# Altium PCB Twitch_Switch_PCB.PcbDoc (part 1 of 3)
Units mil, origin at the board's own origin, x right, y up, seen from the top; angles counter-clockwise.
Board outline 3095 x 1923 mil, 2 copper layers (Top Layer, Bottom Layer); 103 components, 59 nets, 319 pads, 189 vias.
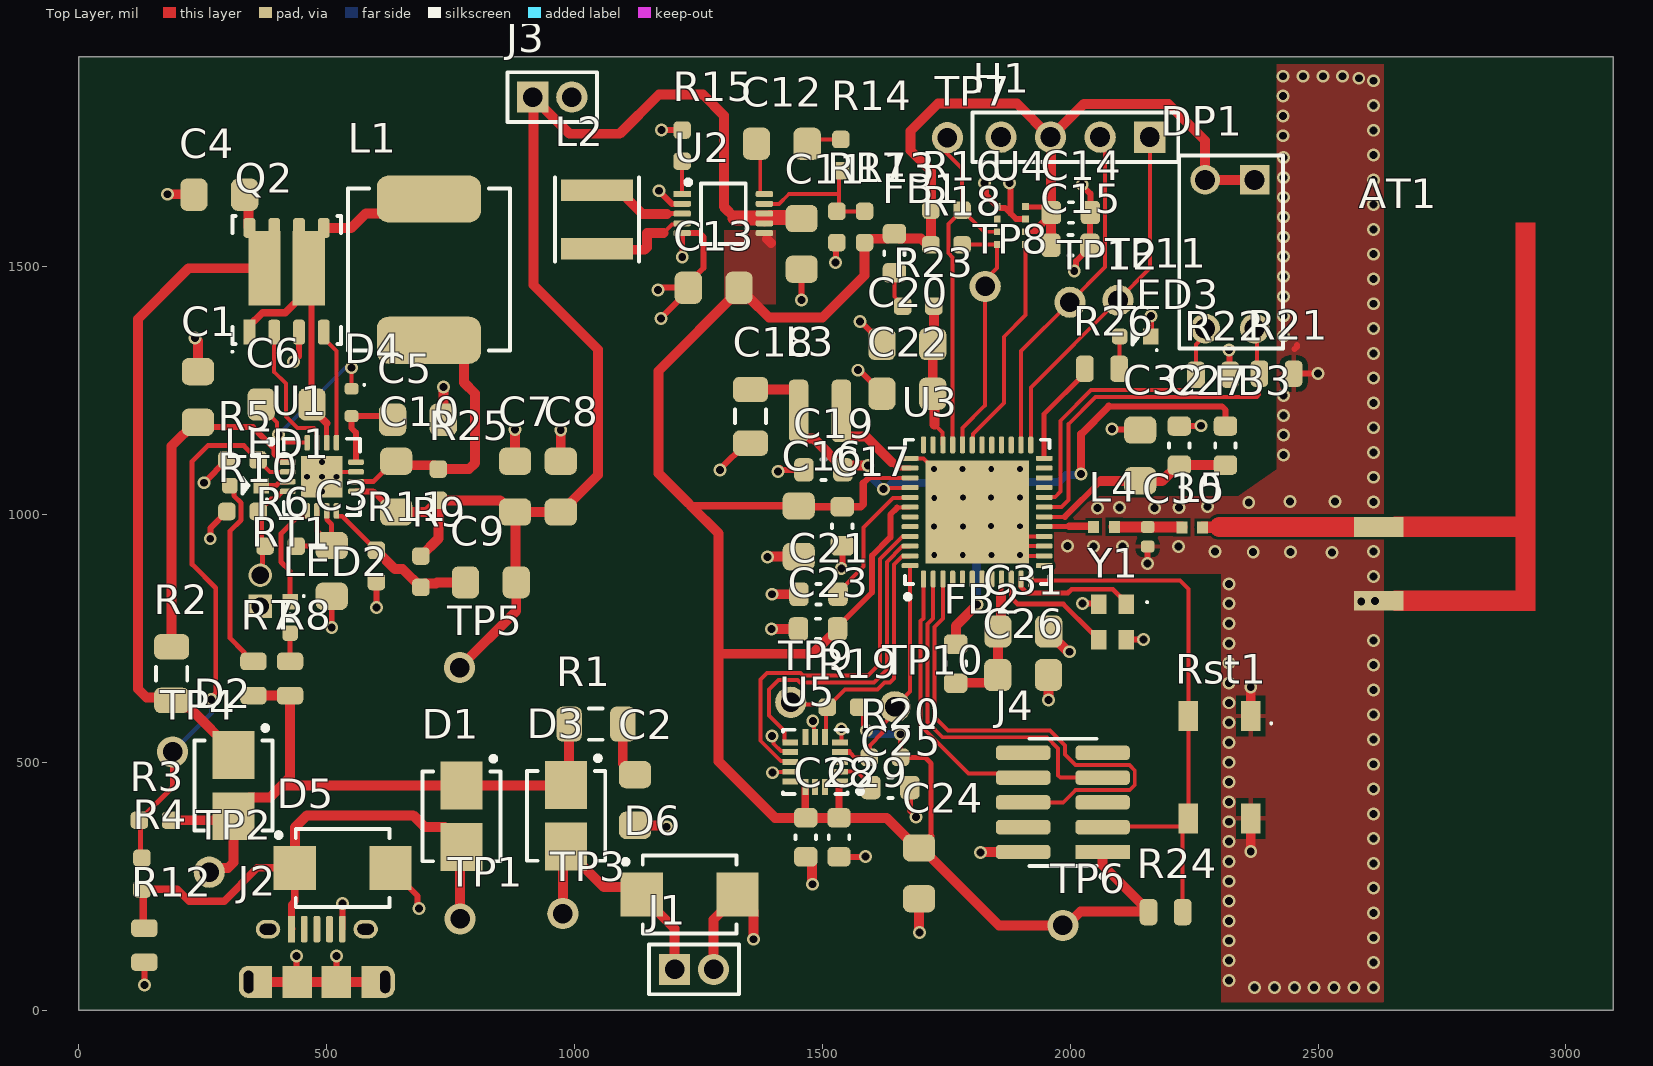
[diagram p0: Top Layer view]
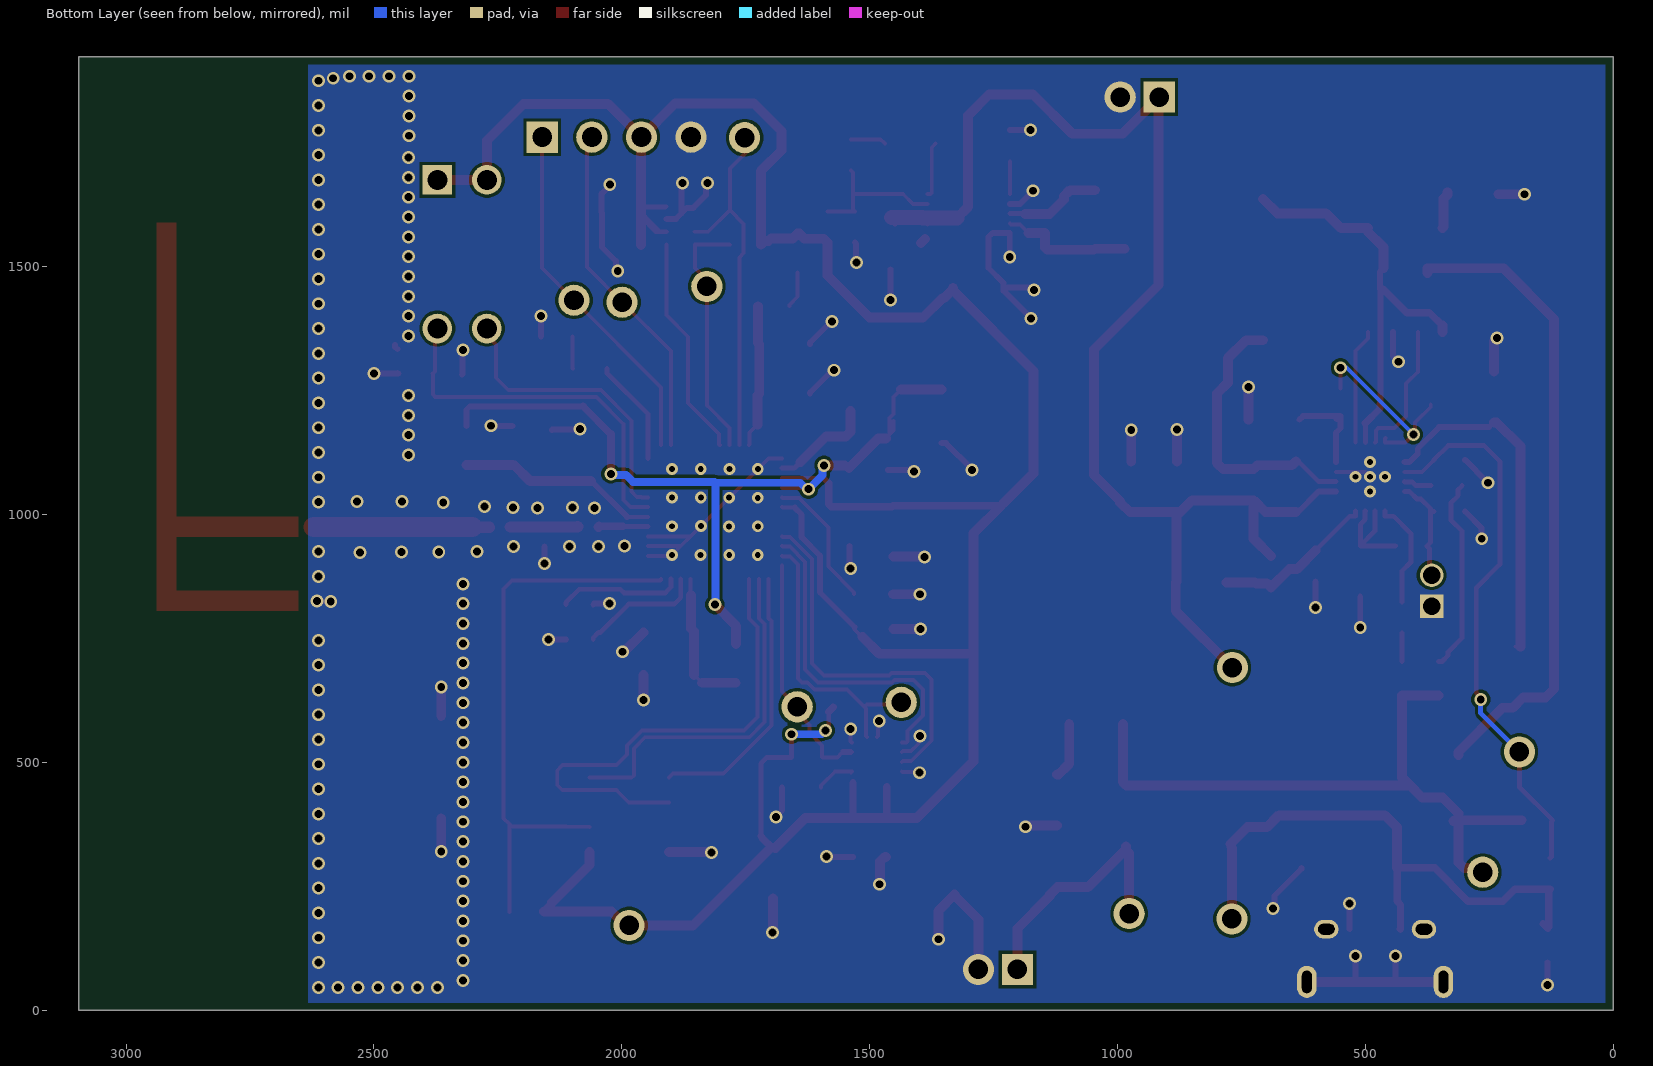
[diagram p1: Bottom Layer view, seen from below]
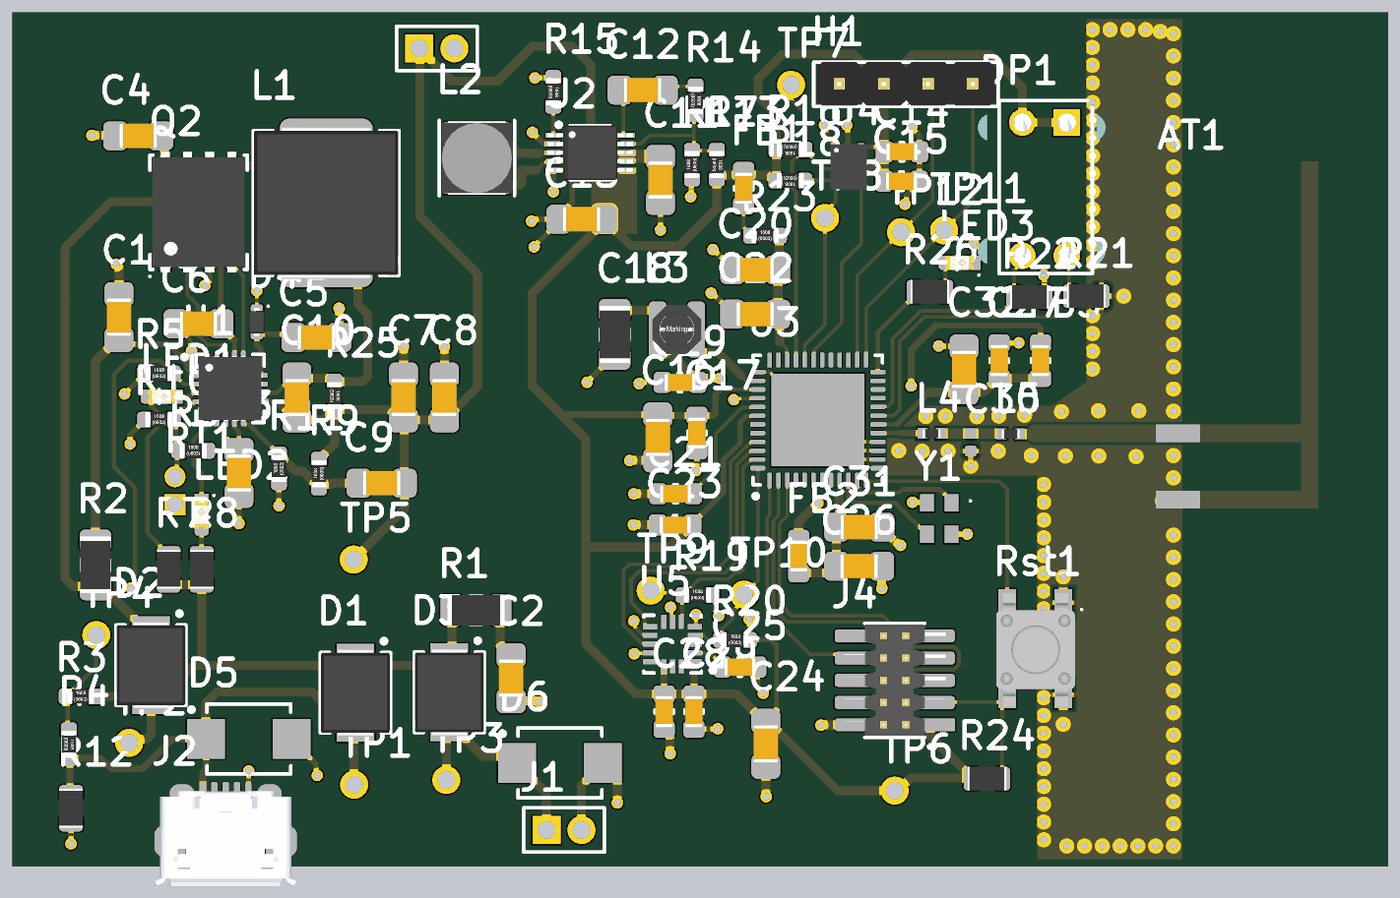
[diagram p3: 3D render of the assembled board from above, using the file's embedded part models]

## Layer stack, top to bottom
Top Solder: solder mask 0.4, Solder Resist, Dk 3.5
Top Layer: signal copper 1.4
Dielectric 1: dielectric 12.6, FR-4, Dk 4.8
Bottom Layer: signal copper 1.4
Bottom Solder: solder mask 0.4, Solder Resist, Dk 3.5

## Board outline
0,0 3095,0 3095,1923 0,1923

## Design rules (kind name [scope] priority, off if disabled: settings)
BoardOutlineClearance [All] p1: gap=15 ignorepadtopadclearanceinfootprint=FALSE
Clearance [All] p1: gap=6 ignorepadtopadclearanceinfootprint=FALSE
MinimumSolderMaskSliver [All] p1: minsoldermaskwidth=4
PolygonConnect Pushbutton_thermals [IsNamedPolygon('GND') vs HasFootprint('DFN300P450X290-4N') OR HasFootprint('CAPC1005X06N') OR HasFootprint('RES_0805_2x1_25MM')] p1: connectstyle=Relief reliefconductorwidth=10 reliefentries=4 polygonreliefangle="90 Angle" airgapwidth=10
PolygonConnect BottomLayerPolygons [IsNamedPolygon('GND_L02_P001')] p2: connectstyle=Direct reliefconductorwidth=10 reliefentries=4 polygonreliefangle="90 Angle" airgapwidth=10
PolygonConnect TopLayerPolygons [IsNamedPolygon('+3V3_VIN_L01_P000') OR IsNamedPolygon('GND')] p3: connectstyle=Direct reliefconductorwidth=10 reliefentries=4 polygonreliefangle="90 Angle" airgapwidth=10
PolygonConnect [All] p4: thpad.connectstyle=Relief thpad.reliefconductorwidth=10 thpad.reliefentries=4 thpad.polygonreliefangle="90 Angle" thpad.airgapwidth=10 smdpad.connectstyle=Relief smdpad.reliefconductorwidth=10 smdpad.reliefentries=4 smdpad.polygonreliefangle="90 Angle" smdpad.airgapwidth=10 via.connectstyle=Direct via.reliefconductorwidth=10 via.reliefentries=4 via.polygonreliefangle="90 Angle" via.airgapwidth=10
RoutingVias [All] p1: holewidth=16 width=26 viastyle="Through Hole" minholewidth=12 minwidth=22 maxholewidth=16 maxwidth=26
SolderMaskExpansion [All] p1: expansion=4 istentingtop=FALSE
Width [All] p1: maxlimit=100 minlimit=6 preferedwidth=10
29 further rules are at their usual default settings.

## Classes and differential pairs
component class Sheet6_MCU_Antenna_Radio_Interface: AT1 C26 C27 C30 C31 C32 FB2 FB3 L4 L5 U3 Y1
component class Sheet5_MCU_PowerDecoupling: C16 C17 C18 C19 C20 C21 C22 C23 FB1 J4 L3 R23 R24 Rst1
component class Sheet4_MCU_Sensors: C14 C15 C24 C25 C28 C29 DP1 H1 LED3 R16 R18 R19 R20 R21 R22 R26 TP7 TP8 TP9 TP10 TP11 TP12 U4 U5
component class Sheet3_Power: C11 C12 C13 L2 R13 R14 R15 R17 TP6 U2
component class Sheet2_Charging: C1 C2 C3 C4 C5 C6 C7 C8 C9 C10 D1 D2 D3 D4 D5 D6 J1 J2 J3 L1 LED1 LED2 Q2 R1 R2 R3 R4 R5 R6 R7 R8 R9 R10 R11 R12 R25 RT1 TP1 TP2 TP3 TP4 TP5 U1

## Components (designator, comment, footprint, x,y, rotation, side; value= is the part's Value field where it differs from the comment)
AT1 "Inverted_F" F_ANTENNA 2622,900.5 r0 top net-tie
C1 "1uF 25V" CAP_0805_1_4MM 240,1237 r90 top
C2 "10uF 10V" CAP_0805_1_4MM 1122,424 r270 top
C3 "1uF 25V" CAP_0805_1_4MM 510,886 r270 top
C4 "10uF 10V" CAP_0805_1_4MM 283.18,1645 r180 top
C5 "1uF 25V" CAP_0805_1_4MM 684,1191 r0 top
C6 "0.1uF 16V" CAP_0805_1_4MM 419,1222 r0 top
C7 "10uF 25V" CAP_0805_1_4MM 880,1056 r90 top
C8 "4.7uF 16V" CAP_0805_1_4MM 972,1056 r90 top
C9 "22pF 16V" CAP_0805_1_4MM 831,863 r0 top
C10 "0.1uF 16V" CAP_0805_1_4MM 640,1056 r270 top
C11 "10uF 25V" CAP_0805_1_4MM 1458,1545.82 r270 top
C12 "1.5nF 100V" CAP_0805_1_4MM 1418,1748 r180 top
C13 "22uF 16V" CAP_0805_1_4MM 1280.63,1457.39 r180 top
C14 "0.1uF 50V" CAP_0603_1MM 2001.25,1609.09 r0 top
C15 "0.1uF 50V" CAP_0603_1MM 2000.25,1543.09 r0 top
C16 "10uF 10V" CAP_0805_1_4MM 1452,966 r270 top
C17 "1uF 16V" CAP_0603_1MM 1540,976 r270 top
C18 "100uF 6.3V" RES_1206_310X16 1355,1198 r270 top
C19 "4.7uF 10V" CAP_0603_1MM 1502,1090 r180 top
C20 "10uF 10V" CAP_0805_1_4MM 1671.25,1343.59 r180 top
C21 "1uF 16V" CAP_0603_1MM 1492,839 r180 top
C22 "10nF 16V" CAP_0805_1_4MM 1671.25,1243.59 r180 top
C23 "1uF 16V" CAP_0603_1MM 1491,769 r180 top
C24 "4.7uF 16V" CAP_0805_1_4MM 1695,276 r90 top
C25 "0.1uF 50V" CAP_0603_1MM 1637,449 r0 top
C26 "100pf 100V" CAP_0805_1_4MM 1904.82,676 r0 top
C27 ".22uF 25V" CAP_0603_1MM 2220,1139 r90 top
C28 "0.1uF 50V" CAP_0603_1MM 1466.41,348.63 r270 top
C29 "0.1uF 50V" CAP_0603_1MM 1533.41,348.63 r270 top
C30 "10pF 50V" CAPC1005X06N 2156,955 r270 top
C31 "10pF 50V" CAP_0805_1_4MM 1905.18,764 r0 top
C32 "10pF 50V" CAP_0805_1_4MM 2141,1119 r90 top
D1 "LSM115JE3/TR13" DIODE_4_31X3_62MM 772,390.99 r270 top
D2 "LSM115JE3/TR13" DIODE_4_31X3_62MM 312,453 r270 top
D3 "LSM115JE3/TR13" DIODE_4_31X3_62MM 983,392 r270 top
D4 "ZLLS350TA" DIODE-SOD_08X16 550,1226 r270 top
D5 "SMBJ5.0CA" DIOM4436X26N 532,287 r0 top
D6 "SMBJ5.0CA" DIOM4436X26N 1232,233 r0 top
DP1 "2-POS DIP" 4-PIN_DIP_2.54MM 2372,1675 r180 top
FB1 "1kohm 1MHz" CAP_0603_1MM 1645.25,1527.09 r270 top
FB2 "1kohm 1MHz" CAP_0603_1MM 1769,699 r270 top
FB3 "1kohm 1MHz" CAP_0603_1MM 2313,1139 r270 top
H1 "0.1\" M Header" 4-PIN_MALE_HEADER_01-IN 2010.25,1761.09 r180 top
J1 "Header 2mm" 2-PIN_MALE_HEADER_2MM 1241,82 r0 top
J2 "micro-USB" micro-USB 480,57 r0 top
J3 "Header 2mm" 2-PIN_MALE_HEADER_2MM 955,1842 r0 top
J4 "1.27mm Header" SAMTEC_FTSH-105-XX-X-DV 1985,419.07 r90 top
L1 "15uH 4.9A" IND_818X818 706,1494 r270 top
L2 "10uH 2A" IND_4x4MM 1045,1595 r270 top
L3 "4.7uH  1A" IND_2828x30 1495,1209 r180 top
L4 "22nH 300mA" INDC1005X06N 2068,975 r0 top
L5 "22nH 300mA" INDC1005X06N 2246,974 r0 top
LED1 "GRN 0603" LED_0603_GRN_WL-SMCW 336,1058 r180 top
LED2 "GRN 0603" LED_0603_GRN_WL-SMCW 426,792 r270 top
LED3 "GRN 0603" LED_0603_GRN_WL-SMCW 2131,1359 r180 top
Q2 "SI7288DP" FET-SO8_POWERPAK_515X615 419,1473 r90 top
R1 "2R" RES_1206_310X16 1043,577 r180 top
R2 "10R" RES_1206_310X16 187,679 r270 top
R3 "60.4k" RES_0603_1608X06 153.5,383 r0 top
R4 "470k" RES_0603_1608X06 127.09,275.31 r270 top
R5 "16.9k" RES_0603_1608X06 330,1110 r0 top
R6 "5.23k" RES_0603_1608X06 407,936 r0 top
R7 "10k" RES_0805_2X1_25MM 352,669 r90 top
R8 "10k" RES_0805_2X1_25MM 426,669 r90 top
R9 "100k" RES_0603_1608X06 690,884.5 r90 top
R10 "30.1k" RES_0603_1608X06 330,1006 r0 top
R11 "100k" RES_0603_1608X06 600,896 r90 top
R12 "10k" RES_0805_2X1_25MM 132,131 r90 top
R13 "340k" RES_0603_1608X06 1585,1580 r270 top
R14 "15k" RES_0603_1608X06 1537,1725 r270 top
R15 "60.4k" RES_0603_1608X06 1217,1744 r270 top
R16 "5.23k" RES_0603_1608X06 1750.25,1614.09 r180 top
R17 "200k" RES_0603_1608X06 1529,1580 r90 top
R18 "5.23k" RES_0603_1608X06 1750.25,1544.09 r180 top
R19 "5.23k" RES_0603_1608X06 1541.41,611.26 r0 top
R20 "5.23k" RES_0603_1608X06 1626,510 r0 top
R21 "10k" RES_0805_2X1_25MM 2416,1284 r180 top
R22 "10k" RES_0805_2X1_25MM 2288,1282 r180 top
R23 "1ohm 5%" RES_0603_1608X06 1693.25,1420.09 r0 top
R24 "10k" RES_0805_2X1_25MM 2192.24,197.77 r180 top
R25 "0.2R" RES_0603_1608X06 725,1060 r270 top
R26 "10k" RES_0805_2X1_25MM 2064,1294 r0 top
Rst1 "PB Switch" DFN300P450X290-4N 2301,490 r270 top
RT1 "10k NTC" NTC-2_THRUHOLE 366,846 r90 top
TP1 "TestPoint_40mm" TP_40MM 769,184 r180 top
TP2 "TestPoint_40mm" TP_40MM 262.91,278.26 r180 top
TP3 "TestPoint_40mm" TP_40MM 976.26,194.75 r180 top
TP4 "TestPoint_40mm" TP_40MM 189,521 r180 top
TP5 "TestPoint_40mm" TP_40MM 768,691 r90 top
TP6 "TestPoint_40mm" TP_40MM 1985,170.77 r90 top
TP7 "TestPoint_40mm" TP_40MM 1752,1760 r90 top
TP8 "TestPoint_40mm" TP_40MM 1828.25,1460.09 r90 top
TP9 "TestPoint_40mm" TP_40MM 1436,621 r90 top
TP10 "TestPoint_40mm" TP_40MM 1646,612 r90 top
TP11 "TestPoint_40mm" TP_40MM 2096.25,1432.09 r90 top
TP12 "TestPoint_40mm" TP_40MM 1999.25,1428.09 r90 top
U1 "BQ24650RVAR" 16-QFN_3_5x3_5 490,1076 r0 top
U2 "LTC3440EMS#TRPBF" 10-MSOP_3x3 1300,1607 r0 top
U3 "EFR32BG13P632F512GM48" QFN50P700X700X90_HS-49N 1812,1005 r90 top
U4 "DPS310XTSA1" 8-VLGA_2x2_5x1 1881.25,1583.09 r0 top
U5 "MMA8452QR1" MMA8452 1485.21,500.63 r180 top
Y1 "38.4MHz" DFN130P200X45-4N 2085,783 r270 top

## Footprints (in the part's own frame and the unit in brackets; to place one, negate y for a bottom-side part, rotate by r counter-clockwise, add the part's x,y. Pads: shape width x height; smd on the part's side, far side on the other; paste and mask are expansions set on the pad)
2-PIN_MALE_HEADER_2MM [mm] "2MM SQ Post Terminal Strip Assembly, 1x2 Pins, Vertical, 2mm Pitch, Male"
  rect 1.6x1.6 hole 1: 1(-1,0)
  round 1.6 hole 1: 2(1,0)
  silkscreen extent -2.3,-1.27 2.3,1.27
4-PIN_DIP_2.54MM [mm] "Terminal Assembly, 2x3 Pins, Vertical, 2.54mm Pitch, Male"
  rect 1.52x1.52 hole 1.02: 1(0,0)
  round 1.52 hole 1.02: 2(0,7.62) 3(2.54,0) 4(2.54,7.62)
  silkscreen extent -1.46,-1.24 3.87,8.64, body extent -2.21,-1.02 5.08,8.64, height 3.81
4-PIN_MALE_HEADER_01-IN [mm] "Assembly .025\" [.64] SQ Post Terminal Strip, 1x4 Pins, Vertical, 2.54mm Pitch, Male"
  rect 1.6x1.6 hole 1.02: 1(-3.81,0)
  round 1.6 hole 1.02: 2(-1.27,0) 3(1.27,0) 4(3.81,0)
  silkscreen extent -5.27,-1.27 5.27,1.27, body extent -5.08,-1.27 5.08,1.22, height 8.54
8-VLGA_2x2_5x1 [mm] "VLGA, 8-Leads, Body 2.00x2.50mmx1.00mm, Pitch 0.65mm"
  rect 0.35x0.35 smd: 1(-0.725,0.975) 2(-0.725,0.325) 3(-0.725,-0.325) 4(-0.725,-0.975) 5(0.725,-0.975) 6(0.725,-0.325) 7(0.725,0.325) 8(0.725,0.975)
  body extent -1.05,-1.5 1.05,1.1, height 1
10-MSOP_3x3 [mm] "MSOP, 10-Leads, Body 3.00x3.00mm, Pitch 0.50mm, IPC Medium Density"
  rect 0.889x0.305 smd mask+0.061: 1(-2.105,1)
  rrect50% 0.889x0.305 smd mask+0.061: 2(-2.105,0.5) 3(-2.105,0) 4(-2.105,-0.5) 5(-2.105,-1) 6(2.106,-1) 7(2.106,-0.5) 8(2.106,0) 9(2.106,0.5) 10(2.106,1)
  silkscreen extent -1.92,-1.55 1.15,1.72, body extent -2.45,-1.55 2.45,1.55, height 1.1
16-QFN_3_5x3_5 [mm] "QFN, 16-Leads, Body 3.50x3.50mm, Pitch 0.50mm, Thermal Pad 1.78x1.78mm, IPC Medium Density"
  rect 0.8x0.28 smd mask+0.051: 1(-1.75,0.75)
  rrect50% 0.8x0.28 smd mask+0.051: 2(-1.75,0.25) 3(-1.75,-0.25) 4(-1.75,-0.75) 9(1.75,-0.75) 10(1.75,-0.25) 11(1.75,0.25) 12(1.75,0.75)
  rrect50% 0.28x0.8 smd mask+0.051: 5(-0.75,-1.75) 6(-0.25,-1.75) 7(0.25,-1.75) 8(0.75,-1.75) 13(0.75,1.75) 14(0.25,1.75) 15(-0.25,1.75) 16(-0.75,1.75)
  rect 2.14x2.14 smd paste-25: PAD(0,0)
  silkscreen extent -2.72,-1.95 1.95,1.95, body extent -1.85,-1.85 1.85,1.85, height 1
CAP_0603_1MM [mm] "Chip Capacitor, 2-Leads, Body 1.60x0.80mm, IPC Medium Density"
  rrect50% 1x1.2 smd: 1(-1,0) 2(1,0)
  silkscreen extent -0.1,-0.53 0.1,0.53, body extent -0.9,-0.5 0.9,0.5, height 1
CAP_0805_1_4MM [mm] "Chip Capacitor, 2-Leads, Body 2.00x1.25mm, IPC Medium Density"
  rrect50% 1.4x1.65 smd: 1(-1.3,0) 2(1.3,0)
  body extent -1.07,-0.7 1.08,0.7, height 1.4
CAPC1005X06N [mm] "Chip Capacitor, 2-Leads, Body 1.00x0.50mm, IPC Medium Density"
  rrect50% 0.6x0.7 smd: 1(-0.5,0) 2(0.5,0)
  body extent -0.53,-0.28 0.53,0.27, height 0.55
DFN130P200X45-4N [mm] "DFN, 4-Leads, Body 2.50x2.00mm, Pitch 1.30mm, IPC Medium Density"
  rect 1x0.8 smd: 1(-0.9,0.7) 2(0.9,0.7) 3(0.9,-0.7) 4(-0.9,-0.7)
  silkscreen extent -1.07,1.73 -0.97,1.83, body extent -1,-1.25 1,1.25, height 0.45
DFN300P450X290-4N [mm] "DFN, 4-Leads, Body 4.50x4.50mm, Pitch 3.00mm, IPC Medium Density"
  rect 1.55x1 smd: 1(-2.625,1.6) 2(2.625,1.6) 3(-2.625,-1.6) 4(2.625,-1.6)
  silkscreen extent -2.3,2.6 -2.2,2.7, body extent -3.2,-2.22 3.3,2.28, height 3.8
DIODE-SOD_08X16 [mm] "SODFL, 2-Leads, Body 0.80x1.60mm, IPC Medium Density"
  rrect50% 0.6x0.7 smd: 1(-0.7,0) 2(0.7,0)
  silkscreen extent -0.95,0.6 -0.85,0.7, body extent -0.8,-0.45 0.8,0.45, height 0.65
DIODE_4_31X3_62MM [mm] "Molded Diode, 2-Leads, Body 4.31x3.62mm, IPC Medium Density"
  rect 2.45x2.15 smd: 1(-1.575,0) 2(1.575,0)
  silkscreen extent -3.07,-2 2.3,2, body extent -2.5,-1.97 2.5,1.97, height 3.3
DIOM4436X26N [mm] "Molded Diode, 2-Leads, Body 4.40x3.62mm, IPC Medium Density"
  rect 2.16x2.26 smd: 1(-2.45,0) 2(2.45,0)
  silkscreen extent -3.4,-2 2.4,2, body extent -2.37,-1.97 2.37,1.97, height 2.61
F_ANTENNA [mil]
  rect 100x40 smd mask-196.85: FEED(0,74.5) GND(0,-74.5)
  Top Layer region: 31,-94.5 315.5,-94.5 315.5,687.5 276.5,687.5 276.5,94.5 31,94.5 31,54.5 276.5,54.5 276.5,-54.5 31,-54.5
FET-SO8_POWERPAK_515X615 [mm] "SO8, 8-Leads, POWERPAK, Body 5.15x6.15mm, Pitch 1.27mm, Thermal Pad 1.60x0.69mm, IPC Medium Density"
  rect 1.27x0.61 smd: 1(-2.67,1.905)
  rrect50% 1.27x0.61 smd: 2(-2.67,0.635) 3(-2.67,-0.635) 4(-2.67,-1.905)
  rrect50% 1.02x0.61 smd: 5(2.67,-1.905) 6(2.67,-0.635) 7(2.67,0.635) 8(2.67,1.905)
  rect 3.81x1.65 smd: ""(0.6,1.13) ""(0.6,-1.13)
  silkscreen extent -3.72,-2.78 3.28,2.83, body extent -3.45,-2.63 3.46,2.63, height 1.12
IND_4x4MM [mm] "Precision Wire Wound Inductor, 2-Leads, Body 4.00x4.00mm, IPC Medium Density"
  rect 1.1x3.7 smd: 1(-1.5,0) 2(1.5,0)
  silkscreen extent -2.15,-2.15 2.15,2.15, body extent -2.1,-2 2.1,2, height 2.2
IND_818X818 [mil] "Molded Inductor, 2-Leads, Body 8.18x8.18mm, IPC Medium Density"
  rrect50% 95x210 smd: 1(-142.5,0) 2(142.5,0)
  silkscreen extent -163,-163 163,163, body extent -171,-163 171,163, height 157
IND_2828x30 [mm] "Precision Wire Wound Inductor, 2-Leads, Body 2.80x2.80mm, IPC Medium Density"
  rrect50% 1x3.2 smd: 1(-1.1,0) 2(1.1,0)
  body extent -1.4,-1.4 1.4,1.4, height 2.8
INDC1005X06N [mm] "Chip Inductor, 2-Leads, Body 1.00x0.50mm, IPC Medium Density"
  rect 0.57x0.62 smd: 1(-0.53,0) 2(0.53,0)
  body extent -0.53,-0.28 0.53,0.28, height 0.55
LED_0603_GRN_WL-SMCW [mm] "SODFL, 2-Leads, Body 0.80x1.80mm, IPC Medium Density"
  rrect50% 0.8x0.8 smd: A(0.8,0)
  rect 0.8x0.8 smd: C(-0.8,0)
  silkscreen extent -1.15,-0.4 0.15,0.75, body extent -0.8,-0.4 0.8,0.4, height 0.71
micro-USB [mm] "microUSB paste-in-pad"
  rect 0.35x1.35 smd mask+0.05: 1(-1.3,2.7)
  rrect50% 0.35x1.35 smd mask+0.05: 2(-0.65,2.7) 3(0,2.7) 4(0.65,2.7) 5(1.3,2.7)
  oval 1.25x0.95 hole 0.55 slot 0.85 at 0 deg mask+0.076: S1(-2.5,2.7) S2(2.5,2.7)
  rrect100% 1x1.65 hole 0.5 slot 1.15 at 90 deg mask+0.076: S3(-3.5,0) S6(3.5,0)
  rect 1.2x1.65 smd mask+0.076: S3(-2.896,0) S6(2.896,0)
  rect 1.5x1.65 smd mask+0.076: S4(-1,0) S5(1,0)
  body extent -4.1,-2.58 4.1,2.85, height 2.71
MMA8452 [mm] "QFN, 16-Leads, Body 3.00x3.00mm, Pitch 0.50mm, IPC Medium Density"
  rect 0.813x0.305 smd mask+0.044: 1(-1.275,1) 2(-1.275,0.5) 3(-1.275,0) 4(-1.275,-0.5) 5(-1.275,-1) 9(1.275,-1) 10(1.275,-0.5) 11(1.275,0) 12(1.275,0.5) 13(1.275,1)
  rect 0.305x0.813 smd mask+0.044: 6(-0.5,-1.275) 7(0,-1.275) 8(0.5,-1.275) 14(0.5,1.275) 15(0,1.275) 16(-0.5,1.275)
  silkscreen extent -2.43,-1.65 1.65,1.65, body extent -1.5,-1.5 1.5,1.5, height 1
NTC-2_THRUHOLE [mm] "NTC, 2 Lead, THRUHOLE"
  rect 1.2x1.2 hole 0.9: 1(-0.8,0)
  round 1.2 hole 0.9: 2(0.8,0)
QFN50P700X700X90_HS-49N [mm] "QFN, 48-Leads, Body 7.00x7.00mm, Pitch 0.50mm, Thermal Pad 4.70x4.70mm, IPC Medium Density"
  rrect50% 0.86x0.26 smd mask+0.05: 1(-3.435,2.75) 2(-3.435,2.25) 3(-3.435,1.75) 4(-3.435,1.25) 5(-3.435,0.75) 6(-3.435,0.25) 7(-3.435,-0.25) 8(-3.435,-0.75) 9(-3.435,-1.25) 10(-3.435,-1.75) 11(-3.435,-2.25) 12(-3.435,-2.75) 25(3.435,-2.75) 26(3.435,-2.25) 27(3.435,-1.75) 28(3.435,-1.25) 29(3.435,-0.75) 30(3.435,-0.25) 31(3.435,0.25) 32(3.435,0.75) 33(3.435,1.25) 34(3.435,1.75) 35(3.435,2.25) 36(3.435,2.75)
  rrect50% 0.26x0.86 smd mask+0.05: 13(-2.75,-3.435) 14(-2.25,-3.435) 15(-1.75,-3.435) 16(-1.25,-3.435) 17(-0.75,-3.435) 18(-0.25,-3.435) 19(0.25,-3.435) 20(0.75,-3.435) 21(1.25,-3.435) 22(1.75,-3.435) 23(2.25,-3.435) 24(2.75,-3.435) 37(2.75,3.435) 38(2.25,3.435) 39(1.75,3.435) 40(1.25,3.435) 41(0.75,3.435) 42(0.25,3.435) 43(-0.25,3.435) 44(-0.75,3.435) 45(-1.25,3.435) 46(-1.75,3.435) 47(-2.25,3.435) 48(-2.75,3.435)
  rect 5.3x5.3 smd: 14(0,0)
  silkscreen extent -4.47,-3.7 3.7,3.7, body extent -3.55,-3.3 3.55,3.8, height 0.9
RES_0603_1608X06 [mm] "Chip Resistor, 2-Leads, Body 1.60x0.80mm, IPC Medium Density"
  rrect50% 0.9x0.9 smd: 1(-0.8,0) 2(0.8,0)
  body extent -0.78,-0.43 0.77,0.42, height 0.45
RES_0805_2X1_25MM [mm] "Chip Resistor, 2-Leads, Body 2.00x1.25mm, IPC Medium Density"
  rrect50% 0.9x1.35 smd: 1(-0.875,0) 2(0.875,0)
  body extent -1.1,-0.67 1.1,0.67, height 0.65
RES_1206_310X16 [mm] "Chip Resistor, 2-Leads, Body 3.10x1.60mm, IPC Medium Density"
  rrect50% 1.3x1.8 smd: 1(-1.375,0) 2(1.375,0)
  silkscreen extent -0.35,-0.8 0.35,0.8, body extent -1.63,-0.87 1.63,0.87, height 0.65
SAMTEC_FTSH-105-XX-X-DV [mm]
  rect 0.74x2.79 smd: 1(-2.54,-2.035)
  rrect50% 0.74x2.79 smd: 2(-2.54,2.035) 3(-1.27,-2.035) 4(-1.27,2.035) 5(0,-2.035) 6(0,2.035) 7(1.27,-2.035) 8(1.27,2.035) 9(2.54,-2.035) 10(2.54,2.035)
  silkscreen extent -3.89,-2.13 3.26,1.72, body extent -3.17,-2.92 3.17,2.92, height 5.56
TP_40MM [mm] "TestPoint, 40mm"
  round 1.6 hole 1 mask+0.102: 1(0,0)

## Part data
AT1: library part INVERTED-F_ANTENNA, "Inverted-F Antenna for .062\" FR4"
C1 C3 C5: library part CL21A105KACLNNC, "Cap Ceramic 1uF 25V X5R 10% SMD 0805 85C Paper T/R", Capacitance=1uF, Case Code (Imperial)=0805, Case Code (Metric)=2012, Dielectric=X5R, Manufacturer=Samsung, Max Operating Temperature=85°C, Min Operating Temperature=-55°C, Package Quantity=1, Tolerance=10%, Voltage Rating=25V, Case/Package=0805, Category="Ceramic Capacitors", ComponentLink1Description=https://datasheet.ciiva.com/25719/cl21a105kaclnnc-25719413.pdf?src-supplier=Digi-Key, ComponentLink1URL=https://datasheet.ciiva.com/25719/cl21a105kaclnnc-25719413.pdf?src-supplier=Digi-Key, ComponentLink2Description=https://datasheet.ciiva.com/16291/cl21a105kaclnnc-16291978.pdf?src-supplier=Future+Electronics, ComponentLink2URL=https://datasheet.ciiva.com/16291/cl21a105kaclnnc-16291978.pdf?src-supplier=Future+Electronics, Construction=Flat, Depth=1.25mm, Height=0.85mm, Lead Free="Lead Free", Length=2mm, Manufacturer Part Number=CL21A105KACLNNC, Mount="Surface Mount", Packaging="Tape and Reel", Pricing 1="4000=0.02185, 8000=0.02033 (USD)", Radiation Hardening=No, RoHS=Yes, RoHS Compliant=Yes, Series=CL, Stock 1=356000, Supplier 1=Digi-Key, Thickness=0.037inch, Width=0.049inch
C2 C4: library part LMK212BJ225MG-T, "CAP CER 2.2UF 10V X5R 0805", Capacitance=2.2uF, Case Code (Imperial)=0805, Case Code (Metric)=2012, Dielectric=X5R, Manufacturer="Taiyo Yuden", Max Operating Temperature=85°C, Min Operating Temperature=-55°C, Resistor Type=Ceramic, Tolerance=20%, Voltage=10V, Case/Package=0805, Category="Ceramic Capacitors", ComponentLink1Description=http://www.mouser.com/ds/2/396/mlcc_all_e-541559.pdf?src-supplier=Mouser, ComponentLink1URL=http://www.mouser.com/ds/2/396/mlcc_all_e-541559.pdf?src-supplier=Mouser, ComponentLink2Description=https://www.yuden.co.jp/productdata/catalog/mlcc01_e.pdf?src-supplier=Digi-Key, ComponentLink2URL=https://www.yuden.co.jp/productdata/catalog/mlcc01_e.pdf?src-supplier=Digi-Key, ComponentLink3Description=http://documents.rs-components.com/techlib://itc_doclist_GB.htm?stockno=7582925&src-supplier=RSComponents, ComponentLink3URL=http://documents.rs-components.com/techlib://itc_doclist_GB.htm?stockno=7582925&src-supplier=RSComponents, ComponentLink4Description=http://ds.yuden.co.jp/TYCOMPAS/ut/detail.do?productNo=LMK212BJ225MG-T&fileName=LMK212BJ225MG-T_SS&mode=specSheetDownload&src-supplier=Digi-Key, ComponentLink4URL=http://ds.yuden.co.jp/TYCOMPAS/ut/detail.do?productNo=LMK212BJ225MG-T&fileName=LMK212BJ225MG-T_SS&mode=specSheetDownload&src-supplier=Digi-Key, ComponentLink5Description=http://www.yuden.co.jp/productdata/catalog/en/mlcc_all_e.pdf?src-supplier=Digi-Key, ComponentLink5URL=http://www.yuden.co.jp/productdata/catalog/en/mlcc_all_e.pdf?src-supplier=Digi-Key, Depth=1.25mm, Halogen Free="Halogen Free", Height=1.25mm, Lead Free="Lead Free", Length=2mm, Manufacturer Part Number=LMK212BJ225MG-T, Mount="Surface Mount", Packaging="Tape and Reel", Pricing 1="1=0.14000, 10=0.10200, 50=0.05780, 100=0.04780, 500=0.03356, 1000=0.02778 (USD)", Radiation Hardening=No, RoHS=Yes, RoHS Compliant=Yes, Series=M, Stock 1=15727, Supplier 1=Digi-Key, Termination=SMD/SMT, Thickness=0.053inch, Voltage Rating=10V, Voltage Rating (DC)=10V, Weight=0.000194oz, Width=1.25mm
C6 C10: library part CC0805JRX7R7BB104, "CAP CER 0.1UF 16V X7R 0805", Capacitance=100nF, Case Code (Imperial)=0805, Case Code (Metric)=2012, Dielectric=X7R, Manufacturer=Yageo, Max Operating Temperature=125°C, Min Operating Temperature=-55°C, Resistor Type=Ceramic, Tolerance=5%, Voltage Rating=16V, Case/Package=0805, Category="Ceramic Capacitors", ComponentLink1Description=https://datasheet.ciiva.com/26918/getdatasheetpartid-755584-26918332.pdf?src-supplier=Verical, ComponentLink1URL=https://datasheet.ciiva.com/26918/getdatasheetpartid-755584-26918332.pdf?src-supplier=Verical, ComponentLink2Description=https://datasheet.ciiva.com/17434/upy-gphc-x7r-6-3v-to-50v-8-17434890.pdf?src-supplier=Avnet+Europe, ComponentLink2URL=https://datasheet.ciiva.com/17434/upy-gphc-x7r-6-3v-to-50v-8-17434890.pdf?src-supplier=Avnet+Europe, Depth=1.25mm, Halogen Free="Halogen Free", Lead Free="Lead Free", Length=2mm, Manufacturer Part Number=CC0805JRX7R7BB104, Mount="Surface Mount", Packaging="Tape and Reel", Pricing 1="1=0.12000, 10=0.08400, 50=0.04760, 100=0.03950, 500=0.02768, 1000=0.02291 (USD)", Radiation Hardening=No, RoHS=Yes, RoHS Compliant=Yes, Series=CC, Stock 1=2346, Supplier 1=Digi-Key, Termination=SMD/SMT, Thickness=0.037inch, Voltage Rating (DC)=16V, Weight=0.000194oz, Width=0.049inch
C7 C11: library part GRM21BR61E106KA73K, "CAP CER 10UF 25V X5R 0805", Capacitance=10uF, Case/Package=0805, Dielectric=X5R, Manufacturer=Murata, Max Operating Temperature=85°C, Min Operating Temperature=-55°C, Package Quantity=10000, Tolerance=10%, Voltage Rating=25V, Category="Ceramic Capacitors", ComponentLink1Description=http://www.mouser.com/ds/2/281/c02e-2905.pdf?src-supplier=Mouser, ComponentLink1URL=http://www.mouser.com/ds/2/281/c02e-2905.pdf?src-supplier=Mouser, ComponentLink2Description=http://search.murata.co.jp/Ceramy/image/img/A01X/G101/ENG/GRM21BR61E106KA73-01.pdf?src-supplier=Digi-Key, ComponentLink2URL=http://search.murata.co.jp/Ceramy/image/img/A01X/G101/ENG/GRM21BR61E106KA73-01.pdf?src-supplier=Digi-Key, ComponentLink3Description=https://search.murata.co.jp/Ceramy/image/img/A01X/G101/ENG/GRM21BR61E106KA73-01.pdf?src-supplier=Digi-Key, ComponentLink3URL=https://search.murata.co.jp/Ceramy/image/img/A01X/G101/ENG/GRM21BR61E106KA73-01.pdf?src-supplier=Digi-Key, Length=0.079inch, Manufacturer Part Number=GRM21BR61E106KA73K, Mount="Surface Mount", Packaging="Tape and Reel", Pricing 1="1=0.23000, 10=0.15700, 50=0.09400, 100=0.07940, 500=0.05434, 1000=0.04807, 2500=0.04598, 5000=0.04180 (USD)", RoHS=Yes, RoHS Compliant=Yes, Stock 1=101639, Supplier 1=Digi-Key, Thickness=0.055inch, Voltage Rating (DC)=25V, Weight=0.000335oz, Width=0.049inch
C8 C24: library part CL21A475KOFNNNG, "CAP CER 4.7UF 16V X5R 0805", Capacitance=4.7uF, Case Code (Imperial)=0805, Case Code (Metric)=2012, Dielectric=X5R, Manufacturer=Samsung, Max Operating Temperature=85°C, Min Operating Temperature=-55°C, Package Quantity=3000, Tolerance=10%, Voltage=16V, Case/Package=0805, Category="Ceramic Capacitors", ComponentLink1Description=https://datasheet.ciiva.com/25731/cl21a475kofnnng-25731814.pdf?src-supplier=Digi-Key, ComponentLink1URL=https://datasheet.ciiva.com/25731/cl21a475kofnnng-25731814.pdf?src-supplier=Digi-Key, ComponentLink2Description=https://datasheet.ciiva.com/29199/455276-da-01-en-vs-kondensator-0805-29199361.pdf?src-supplier=Conrad, ComponentLink2URL=https://datasheet.ciiva.com/29199/455276-da-01-en-vs-kondensator-0805-29199361.pdf?src-supplier=Conrad, ComponentLink3Description=https://datasheet.ciiva.com/26310/mlcc-catalogdownload2013-eng-26310158.pdf?src-supplier=Distrelec, ComponentLink3URL=https://datasheet.ciiva.com/26310/mlcc-catalogdownload2013-eng-26310158.pdf?src-supplier=Distrelec, ComponentLink4Description=https://datasheet.ciiva.com/16428/cl05b104kq5nnnc-16428879.pdf?src-supplier=Future+Electronics, ComponentLink4URL=https://datasheet.ciiva.com/16428/cl05b104kq5nnnc-16428879.pdf?src-supplier=Future+Electronics, Depth=1.25mm, Height=1.25mm, Lead Free="Lead Free", Length=2mm, Manufacturer Part Number=CL21A475KOFNNNG, Material=Ceramic, Mount="Surface Mount", Packaging="Tape and Reel", Pricing 1="1=0.12000, 10=0.08800, 50=0.05000, 100=0.04140, 500=0.02906, 1000=0.02405 (USD)", RoHS=Yes, RoHS Compliant=Yes, Series=CL, Stock 1=18827, Supplier 1=Digi-Key, Thickness=0.053inch, Voltage Rating=16V, Width=0.049inch
C9: library part VJ0805A220KXJPW1BC, "CAP CER 22PF 16V C0G/NP0 0805", Capacitance=22pF, Case Code (Imperial)=0805, Case Code (Metric)=2012, Dielectric=C0G, Dielectric Material=Tantalum, Manufacturer="Vishay Vitramon", Max Operating Temperature=125°C, Min Operating Temperature=-55°C, Package Quantity=15000, Tolerance=10%, Voltage Rating (DC)=16V, Case/Package=0805, Category="Ceramic Capacitors", ComponentLink1Description=http://www.mouser.com/ds/2/427/vjw1bcbascomseries-223529.pdf?src-supplier=Mouser, ComponentLink1URL=http://www.mouser.com/ds/2/427/vjw1bcbascomseries-223529.pdf?src-supplier=Mouser, ComponentLink2Description=http://www.vishay.com/docs/28548/vjw1bcbascomseries.pdf?src-supplier=Avnet, ComponentLink2URL=http://www.vishay.com/docs/28548/vjw1bcbascomseries.pdf?src-supplier=Avnet, ComponentLink3Description=https://www.vishay.com/docs/28548/vjw1bcbascomseries.pdf?src-supplier=Digi-Key, ComponentLink3URL=https://www.vishay.com/docs/28548/vjw1bcbascomseries.pdf?src-supplier=Digi-Key, Construction=Flat, Depth=1.25mm, Height=1.45mm, Lead Free="Lead Free", Length=2mm, Manufacturer Part Number=VJ0805A220KXJPW1BC, Mount="Surface Mount", Packaging="Tape and Reel", Pricing 1="1=0.20000, 10=0.14000, 50=0.07940, 100=0.06580, 500=0.04614, 1000=0.03819, 2500=0.03554, 5000=0.03252 (USD)", RoHS=Yes, RoHS Compliant=Yes, Series="VJ W1BC", Stock 1=14990, Supplier 1=Digi-Key, Termination=SMD/SMT, Width=1.25mm
C12: library part C0805C152J1RECAUTO, "Cap Cer 0805 1.5NF 100V X7R 5%"
C13: library part CL21A226MOCLRNC, "CAP CER 22UF 16V X5R 0805", Capacitance=22uF, Case Code (Imperial)=0805, Case Code (Metric)=2012, Manufacturer=Samsung, Max Operating Temperature=85°C, Min Operating Temperature=-55°C, Tolerance=20%, Voltage Rating=16V, Case/Package=0805, Category="Ceramic Capacitors", ComponentLink1Description=http://www.samsungsem.com/kr/support/product-search/mlcc/CL21A226MOCLRNC.jsp?src-supplier=Digi-Key, ComponentLink1URL=http://www.samsungsem.com/kr/support/product-search/mlcc/CL21A226MOCLRNC.jsp?src-supplier=Digi-Key, Length=0.079inch, Manufacturer Part Number=CL21A226MOCLRNC, Mount="Surface Mount", Packaging="Tape and Reel", Pricing 1="1=0.35000, 10=0.23900, 50=0.15920, 100=0.13540, 500=0.09554, 1000=0.08360 (USD)", RoHS=Yes, Stock 1=182418, Supplier 1=Digi-Key, Thickness=0.037inch, Width=0.049inch
C14 C15 C25 C28 C29: library part CC0603KRX7R9BB104, "CAPACITOR CERAMIC, 0.1UF, 50V, X7R, 10%, 0603", Capacitance=100nF, Case Code (Imperial)=0603, Case Code (Metric)=1608, Dielectric=X7R, Dielectric Material=Ceramic, Manufacturer=Yageo, Max Operating Temperature=125°C, Min Operating Temperature=-55°C, Package Quantity=1, Tolerance=10%, Voltage=50V, Case/Package=0603, Category="Ceramic Capacitors", ComponentLink1Description=https://datasheet.ciiva.com/11786/0900766b80d84f1d-11786061.pdf?src-supplier=RSComponents, ComponentLink1URL=https://datasheet.ciiva.com/11786/0900766b80d84f1d-11786061.pdf?src-supplier=RSComponents, ComponentLink2Description=https://datasheet.ciiva.com/144/mlccorderingcode-144176.pdf?src-supplier=Digi-Key, ComponentLink2URL=https://datasheet.ciiva.com/144/mlccorderingcode-144176.pdf?src-supplier=Digi-Key, ComponentLink3Description=https://datasheet.ciiva.com/144/mlccorderingcode-144177.pdf?src-supplier=Digi-Key, ComponentLink3URL=https://datasheet.ciiva.com/144/mlccorderingcode-144177.pdf?src-supplier=Digi-Key, ComponentLink4Description=https://datasheet.ciiva.com/144/mlccorderingcode-144178.pdf?src-supplier=Digi-Key, ComponentLink4URL=https://datasheet.ciiva.com/144/mlccorderingcode-144178.pdf?src-supplier=Digi-Key, ComponentLink5Description=https://datasheet.ciiva.com/31394/1489800-31394927.pdf?src-supplier=Farnell, ComponentLink5URL=https://datasheet.ciiva.com/31394/1489800-31394927.pdf?src-supplier=Farnell, ComponentLink6Description=https://datasheet.ciiva.com/8033/70765-8033819.pdf?src-supplier=Element14, ComponentLink6URL=https://datasheet.ciiva.com/8033/70765-8033819.pdf?src-supplier=Element14, ComponentLink7Description=https://datasheet.ciiva.com/8033/70765-8033821.pdf?src-supplier=Element14, ComponentLink7URL=https://datasheet.ciiva.com/8033/70765-8033821.pdf?src-supplier=Element14, ComponentLink8Description=https://datasheet.ciiva.com/22749/1489800-22749214.pdf?src-supplier=Element14, ComponentLink8URL=https://datasheet.ciiva.com/22749/1489800-22749214.pdf?src-supplier=Element14, ComponentLink9Description=https://datasheet.ciiva.com/7978/1489800-7978166.pdf?src-supplier=Element14, ComponentLink9URL=https://datasheet.ciiva.com/7978/1489800-7978166.pdf?src-supplier=Element14, ComponentLink10Description=https://datasheet.ciiva.com/16625/upy-gphc-x7r-6-3v-to-50v-8-16625530.pdf?src-supplier=Avnet+Europe, ComponentLink10URL=https://datasheet.ciiva.com/16625/upy-gphc-x7r-6-3v-to-50v-8-16625530.pdf?src-supplier=Avnet+Europe, Depth=0.8mm, Halogen Free="Halogen Free", Height=0.8mm, Lead Free="Lead Free", Length=1.6mm, Manufacturer Part Number=CC0603KRX7R9BB104, Mount="Surface Mount", Number of Pins=2, Packaging="Tape and Reel", Pricing 1="1=0.10000, 10=0.05900, 50=0.03240, 100=0.02640, 500=0.01886, 1000=0.01482 (USD)", Radiation Hardening=No, REACH SVHC="No SVHC", RoHS=Yes, RoHS Compliant=Yes, Series=CC, Stock 1=8863982, Supplier 1=Digi-Key, Termination=SMD/SMT, Thickness=0.035inch, Voltage Rating=50V, Width=0.031inch
C16 C20: library part C0805C106K8PACTU, "CAP CER 10UF 10V X5R 0805", Capacitance=10uF, Case Code (Imperial)=0805, Case Code (Metric)=2012, Dielectric=X5R, Dielectric Material=Ceramic, Manufacturer=KEMET, Max Operating Temperature=85°C, Min Operating Temperature=-55°C, Package Quantity=1, Tolerance=10%, Voltage=10V, Case/Package=0805, Category="Ceramic Capacitors", ComponentLink1Description=https://datasheet.ciiva.com/7842/1732709-7842198.pdf?src-supplier=Element14, ComponentLink1URL=https://datasheet.ciiva.com/7842/1732709-7842198.pdf?src-supplier=Element14, ComponentLink2Description=https://datasheet.ciiva.com/7842/40889-7842552.pdf?src-supplier=Element14, ComponentLink2URL=https://datasheet.ciiva.com/7842/40889-7842552.pdf?src-supplier=Element14, ComponentLink3Description=https://datasheet.ciiva.com/22704/1732709-22704859.pdf?src-supplier=Element14, ComponentLink3URL=https://datasheet.ciiva.com/22704/1732709-22704859.pdf?src-supplier=Element14, Construction=Flat, Contact Plating=Tin,Matte, Depth=1.25mm, Dissipation Factor=10%, Height=1.25mm, Length=2mm, Manufacturer Part Number=C0805C106K8PACTU, Mount="Surface Mount", Number of Pins=2, Packaging="Tape and Reel", Pricing 1="1=0.14000, 10=0.10200, 50=0.05780, 100=0.04780, 500=0.03356, 1000=0.02778 (USD)", Radiation Hardening=No, REACH SVHC="No SVHC", RoHS=Yes, RoHS Compliant=Yes, Series=C, Stock 1=936862, Supplier 1=Digi-Key, Termination=SMD/SMT, Thickness=0.055inch, Voltage Rating=10V, Voltage Rating (DC)=10V, Width=1.2mm
C17 C21 C23: library part C0603C105K4RAC7411, "KEMET - C0603C105K4RAC7411 - Condensatore Ceramico Multistrato SMD, 1 µF, 16 V, 0603 [1608 Metrico], ± 10%, X7R, Serie C KEMET", Capacitance=1uF, Case/Package=0603, Dielectric=X7R, Dielectric Material=Ceramic, Manufacturer=KEMET, Max Operating Temperature=125°C, Min Operating Temperature=-55°C, Tolerance=10%, Voltage Rating (DC)=16V, Category=Capacitors, ComponentLink1Description=http://www.farnell.com/datasheets/2747787.pdf?src-supplier=Farnell, ComponentLink1URL=http://www.farnell.com/datasheets/2747787.pdf?src-supplier=Farnell, ComponentLink2Description=http://components.arrow.com/part/dataview/0323_00313824?src-supplier=Arrow+Europe, ComponentLink2URL=http://components.arrow.com/part/dataview/0323_00313824?src-supplier=Arrow+Europe, ComponentLink3Description=http://www.farnell.com/datasheets/2747787.pdf?src-supplier=Newark, ComponentLink3URL=http://www.farnell.com/datasheets/2747787.pdf?src-supplier=Newark, ComponentLink4Description=http://www.farnell.com/datasheets/2747787.pdf?src-supplier=Element14, ComponentLink4URL=http://www.farnell.com/datasheets/2747787.pdf?src-supplier=Element14, Depth=0.8mm, Length=1.6mm, Manufacturer Part Number=C0603C105K4RAC7411, Packaging="Tape and Reel", Pricing 1="1=0.10000, 10=0.07600, 50=0.04160, 100=0.03400, 500=0.02426, 1000=0.01906, 2500=0.01732, 5000=0.01594 (USD)", RoHS=Yes, Stock 1=34224, Supplier 1=Digi-Key
C18: library part GRM31CR60J107ME39L, "1206 100 uF 6.3 V ±20% Tolerance X5R SMT Multilayer Ceramic Capacitor"
C19: library part C0603C475K8PAC7411, "Cap Ceramic 4.7uF 10V X5R 10% SMD 0603 85°C Paper T/R", Capacitance=4.7uF, Case/Package=0603, Dielectric=X5R, Dielectric Material=Ceramic, Manufacturer=KEMET, Tolerance=10%, Voltage Rating (DC)=10V, Category=Capacitors, Lead Free="Lead Free", Manufacturer Part Number=C0603C475K8PAC7411, Pricing 1="1=0.31000, 10=0.21400, 50=0.14300, 100=0.12160, 500=0.08580, 1000=0.07508, 2500=0.07150, 5000=0.06614 (USD)", RoHS=Yes, RoHS Compliant=Yes, Stock 1=15372, Supplier 1=Digi-Key
C22: library part C0603C103K4REC7867, "Cap Cer 0603 10NF 16V X7R 10%", Manufacturer=KEMET, Manufacturer Part Number=C0603C103K4REC7867, Pricing 1="1=0.12000, 10=0.08800, 50=0.04820, 100=0.03930, 500=0.02810, 1000=0.02208 (USD)", Stock 1=7695, Supplier 1=Digi-Key
C26: library part CL21C101JCANNNC, "Capacitor 100 pF 100 VDC PU=4000 ST, CL21C101JCANNNC, Samsung", Capacitance=100pF, Case Code (Imperial)=0805, Case Code (Metric)=2012, Dielectric=C0G, Manufacturer=Samsung, Max Operating Temperature=125°C, Min Operating Temperature=-55°C, Package Quantity=1, Temperature Coefficient=300ppm/°C, Tolerance=5%, Voltage=100V, Case/Package=0805, Category="Ceramic Capacitors", ComponentLink1Description=https://datasheet.ciiva.com/15195/getdatasheetpartid-543198-15195932.pdf?src-supplier=Verical, ComponentLink1URL=https://datasheet.ciiva.com/15195/getdatasheetpartid-543198-15195932.pdf?src-supplier=Verical, ComponentLink2Description=https://datasheet.ciiva.com/29199/454055-da-01-en-vs-kondensator-0805-29199890.pdf?src-supplier=Conrad, ComponentLink2URL=https://datasheet.ciiva.com/29199/454055-da-01-en-vs-kondensator-0805-29199890.pdf?src-supplier=Conrad, ComponentLink3Description=https://datasheet.ciiva.com/26310/mlcc-catalogdownload2013-eng-26310191.pdf?src-supplier=Distrelec, ComponentLink3URL=https://datasheet.ciiva.com/26310/mlcc-catalogdownload2013-eng-26310191.pdf?src-supplier=Distrelec, Construction=Flat, Contact Plating=Tin, Depth=1.25mm, Height=0.65mm, Length=2mm, Manufacturer Part Number=CL21C101JCANNNC, Material=Ceramic, Mount="Surface Mount", Packaging="Tape and Reel", Pricing 1="1=0.10000, 10=0.04500, 50=0.02440, 100=0.02000, 500=0.01428, 1000=0.01122 (USD)", Radiation Hardening=No, RoHS=Yes, RoHS Compliant=Yes, Series=CL, Stock 1=199319, Supplier 1=Digi-Key, Thickness=0.03inch, Voltage Rating=100V, Width=0.049inch
C27: library part TMK107B7224KA-T, "TAIYO YUDEN - TMK107B7224KA-T - SMD Multilayer Ceramic Capacitor, 0.22 µF, 25 V, 0603 [1608 Metric], ± 10%, X7R, M Series", Capacitance=220nF, Case Code (Imperial)=0603, Case Code (Metric)=1608, Dielectric=X7R, Manufacturer="Taiyo Yuden", Max Operating Temperature=125°C, Min Operating Temperature=-55°C, Package Quantity=1, Resistor Type=Ceramic, Tolerance=10%, Voltage Rating=25V, Case/Package=0603, Category="Ceramic Capacitors", ComponentLink1Description=https://datasheet.ciiva.com/30146/emultilayer-ceramic-capacitor-30146647.pdf?src-supplier=Onlinecomponents.com, ComponentLink1URL=https://datasheet.ciiva.com/30146/emultilayer-ceramic-capacitor-30146647.pdf?src-supplier=Onlinecomponents.com, ComponentLink2Description=https://datasheet.ciiva.com/7975/746258-7975850.pdf?src-supplier=Element14, ComponentLink2URL=https://datasheet.ciiva.com/7975/746258-7975850.pdf?src-supplier=Element14, ComponentLink3Description=https://datasheet.ciiva.com/132/mlcc-all-e-132763.pdf?src-supplier=Digi-Key, ComponentLink3URL=https://datasheet.ciiva.com/132/mlcc-all-e-132763.pdf?src-supplier=Digi-Key, ComponentLink4Description=https://datasheet.ciiva.com/28645/746258-28645259.pdf?src-supplier=Element14, ComponentLink4URL=https://datasheet.ciiva.com/28645/746258-28645259.pdf?src-supplier=Element14, ComponentLink5Description=https://datasheet.ciiva.com/30209/emultilayer-ceramic-capacitor-30209147.pdf?src-supplier=Onlinecomponents.com, ComponentLink5URL=https://datasheet.ciiva.com/30209/emultilayer-ceramic-capacitor-30209147.pdf?src-supplier=Onlinecomponents.com, ComponentLink6Description=https://datasheet.ciiva.com/132/mlcc-all-e-132764.pdf?src-supplier=Digi-Key, ComponentLink6URL=https://datasheet.ciiva.com/132/mlcc-all-e-132764.pdf?src-supplier=Digi-Key, ComponentLink7Description=https://datasheet.ciiva.com/132/mlcc-all-e-132765.pdf?src-supplier=Digi-Key, ComponentLink7URL=https://datasheet.ciiva.com/132/mlcc-all-e-132765.pdf?src-supplier=Digi-Key, ComponentLink8Description=https://datasheet.ciiva.com/15922/emultilayer-ceramic-capacitor-15922381.pdf?src-supplier=Onlinecomponents.com, ComponentLink8URL=https://datasheet.ciiva.com/15922/emultilayer-ceramic-capacitor-15922381.pdf?src-supplier=Onlinecomponents.com, Construction=Flat, Depth=0.8mm, Height=0.8mm, Length=1.6mm, Manufacturer Part Number=TMK107B7224KA-T, Mount="Surface Mount", Packaging="Tape and Reel", Pricing 1="1=0.11000, 10=0.07600, 50=0.04340, 100=0.03590, 500=0.02516, 1000=0.02083 (USD)", Radiation Hardening=No, REACH SVHC=Unknown, RoHS=Yes, RoHS Compliant=Yes, Series=M, Stock 1=362990, Supplier 1=Digi-Key, Termination=SMD/SMT, Thickness=0.035inch, Voltage Rating (DC)=25V, Width=0.8mm
C30 C31 C32: library part C0402C100K5RAC7867, "Cap Ceramic 10pF 50V X7R 10% SMD 0402 125°C Paper T/R", Manufacturer=KEMET, ComponentLink1Description=http://datasheet.octopart.com/C0402C100K5RAC7867-KEMET-datasheet-84169754.pdf, ComponentLink1URL=http://datasheet.octopart.com/C0402C100K5RAC7867-KEMET-datasheet-84169754.pdf, Manufacturer Part Number=C0402C100K5RAC7867, Pricing 1="1=0.10000, 10=0.06000, 50=0.03300, 100=0.02700, 500=0.01924, 1000=0.01512, 2500=0.01375, 5000=0.01265 (USD)", RoHS Compliant=Yes, Stock 1=20482, Supplier 1=Digi-Key
D1 D2 D3: "DIODE SCHOTTKY 30V 200MA SOD323", Average Rectified Current=1A, Forward Voltage=220mV, Manufacturer=Microsemi, Max Forward Surge Current (Ifsm)=50A, Max Operating Temperature=100°C, Max Repetitive Reverse Voltage (Vrrm)=15V, Max Reverse Current=10mA, Max Reverse Leakage Current=50uA, Min Operating Temperature=-55°C, Package Quantity=3000, Power Dissipation=250mW, Voltage=30V, Category="Rectifier Diodes", ComponentLink1Description=https://datasheet.ciiva.com/917/lsm115j-917432.pdf?src-supplier=Digi-Key, ComponentLink1URL=https://datasheet.ciiva.com/917/lsm115j-917432.pdf?src-supplier=Digi-Key, ComponentLink2Description=https://datasheet.ciiva.com/4715/cmdsh2-3-39086-4715895.pdf?src-supplier=Mouser, ComponentLink2URL=https://datasheet.ciiva.com/4715/cmdsh2-3-39086-4715895.pdf?src-supplier=Mouser, ComponentLink3Description=https://datasheet.ciiva.com/16396/cmdsh2-3-16396583.pdf?src-supplier=Future+Electronics, ComponentLink3URL=https://datasheet.ciiva.com/16396/cmdsh2-3-16396583.pdf?src-supplier=Future+Electronics, Element Configuration=Single, Forward Current=1A, Lead Free="Lead Free", Manufacturer Part Number=LSM115JE3/TR13, Max Reverse Voltage (DC)=15V, Max Surge Current=1A, Mount="Surface Mount", Number of Pins=2, Packaging="Tape and Reel", Peak Non-Repetitive Surge Current=50A, Pricing 1="1=1.08000, 10=0.88700, 100=0.69010, 500=0.58490, 1000=0.47647 (USD)", Pricing 2="1=0.63000, 10=0.54300, 100=0.37560, 500=0.31386, 1000=0.26712 (USD)", Radiation Hardening=No, Reverse Voltage (DC)=15V, RoHS=Yes, RoHS Compliant=No, Series=-, Stock 1=39247, Stock 2=32, Supplier 1=Digi-Key, Supplier 2=Digi-Key, Weight=0.003668oz
D4: "Diode Schottky 40V 0.65A 2Pin SOD523", Average Rectified Current=380mA, Capacitance=3.5pF, Forward Current=650mA, Forward Voltage=1V, Manufacturer="Diodes Zetex", Max Forward Surge Current (Ifsm)=6A, Max Operating Temperature=150°C, Max Power Dissipation=357mW, Max Repetitive Reverse Voltage (Vrrm)=40V, Max Reverse Current=4uA, Min Operating Temperature=-55°C, Package Quantity=3000, Category="Schottky Diodes", ComponentLink1Description=https://datasheet.ciiva.com/4715/zlls350-4715700.pdf?src-supplier=Avnet, ComponentLink1URL=https://datasheet.ciiva.com/4715/zlls350-4715700.pdf?src-supplier=Avnet, ComponentLink2Description=https://datasheet.ciiva.com/4715/zlls350-4715700.pdf?src-supplier=Mouser, ComponentLink2URL=https://datasheet.ciiva.com/4715/zlls350-4715700.pdf?src-supplier=Mouser, ComponentLink3Description=https://datasheet.ciiva.com/914/zlls350-914216.pdf?src-supplier=Digi-Key, ComponentLink3URL=https://datasheet.ciiva.com/914/zlls350-914216.pdf?src-supplier=Digi-Key, ComponentLink4Description=https://datasheet.ciiva.com/914/zlls350-914217.pdf?src-supplier=Digi-Key, ComponentLink4URL=https://datasheet.ciiva.com/914/zlls350-914217.pdf?src-supplier=Digi-Key, ComponentLink5Description=https://datasheet.ciiva.com/914/zlls350-914218.pdf?src-supplier=Digi-Key, ComponentLink5URL=https://datasheet.ciiva.com/914/zlls350-914218.pdf?src-supplier=Digi-Key, Contact Plating=Tin,Matte, Current Rating=380mA, Diode Type=RECTIFIER, Element Configuration=Single, Height=0.8mm, Lead Free="Lead Free", Length=1.3mm, Manufacturer Part Number=ZLLS350TA, Max Reverse Voltage (DC)=40V, Mount="Surface Mount", Number of Pins=2, Output Current=380mA, Packaging="Tape and Reel", Peak Non-Repetitive Surge Current=6A, Polarity=Standard, Power Dissipation=357mW, Power Rating=357mW, Pricing 1="1=0.44000, 10=0.37700, 100=0.26180, 500=0.20442, 1000=0.16616 (USD)", Radiation Hardening=No, Reverse Recovery Time=1ns, RoHS=Yes, RoHS Compliant=Yes, Series=-, Stock 1=114407, Supplier 1=Digi-Key, Termination=SMD/SMT, Voltage Rating (DC)=40V, Weight=3.5E-05oz, Width=0.9mm
D5 D6: "BOURNS - SMBJ5.0CA - TVS Diode, Transil SMBJ Series, Bidirectional, 5 V, 9.2 V, DO-214AA (SMB), 2 Pins", Breakdown Voltage=7.25V, Case/Package=DO-214AA, Clamping Voltage=9.2V, Leakage Current=1.6mA, Manufacturer=Bourns, Max Operating Temperature=150°C, Max Power Dissipation=600W, Max Surge Current=100A, Min Breakdown Voltage=6.4V, Min Operating Temperature=-55°C, Operating Supply Voltage=3.5V, Package Quantity=1, Peak Pulse Current=65.2A, Power Line Protection=No, Resistor Type=Zener, Reverse Standoff Voltage=5V, Test Current=10mA, Category="TVS Diodes", ComponentLink1Description=https://datasheet.ciiva.com/334/smbj-334706.pdf?src-supplier=Digi-Key, ComponentLink1URL=https://datasheet.ciiva.com/334/smbj-334706.pdf?src-supplier=Digi-Key, ComponentLink2Description=https://datasheet.ciiva.com/334/smbj-334707.pdf?src-supplier=Digi-Key, ComponentLink2URL=https://datasheet.ciiva.com/334/smbj-334707.pdf?src-supplier=Digi-Key, ComponentLink3Description=https://datasheet.ciiva.com/334/smbj-334708.pdf?src-supplier=Digi-Key, ComponentLink3URL=https://datasheet.ciiva.com/334/smbj-334708.pdf?src-supplier=Digi-Key, ComponentLink4Description=https://datasheet.ciiva.com/3022/smbj-3022578.pdf?src-supplier=Avnet, ComponentLink4URL=https://datasheet.ciiva.com/3022/smbj-3022578.pdf?src-supplier=Avnet, ComponentLink5Description=https://datasheet.ciiva.com/8031/1677318-8031161.pdf?src-supplier=Element14, ComponentLink5URL=https://datasheet.ciiva.com/8031/1677318-8031161.pdf?src-supplier=Element14, ComponentLink6Description=https://datasheet.ciiva.com/28410/1677318-28410120.pdf?src-supplier=Element14, ComponentLink6URL=https://datasheet.ciiva.com/28410/1677318-28410120.pdf?src-supplier=Element14, ComponentLink7Description=https://datasheet.ciiva.com/30104/smbj-30104446.pdf?src-supplier=Onlinecomponents.com, ComponentLink7URL=https://datasheet.ciiva.com/30104/smbj-30104446.pdf?src-supplier=Onlinecomponents.com, Diode Type=ZENER, Direction=Bidirectional, Element Configuration=Single, Manufacturer Part Number=SMBJ5.0CA, Max Breakdown Voltage=7.25V, Max Reverse Leakage Current=1.6mA, Mount="Surface Mount", Number of Bidirectional Channels=1, Number of Channels=1, Number of Elements=1, Number of Pins=2, Packaging="Tape and Reel", Peak Pulse Power=600W, Polarity=Bidirectional, Pricing 1="1=0.49000, 10=0.36900, 100=0.22960, 500=0.15710, 1000=0.12084 (USD)", Radiation Hardening=No, REACH SVHC="No SVHC", Reverse Breakdown Voltage=6.4V, RoHS=Yes, RoHS Compliant=Yes, Series=SMBJ, Stock 1=1299, Supplier 1=Digi-Key, Termination=SMD/SMT
DP1: library part 206-2, "SWITCH SLIDE DIP SPST 50MA 24V"
FB1 FB2 FB3: library part 74279266, "WURTH ELEKTRONIK - 74279266 - Ferrite Bead, 0603 [1608 Metric], 1 kohm, 200 mA, WE-CBF Series, 0.6 ohm, ± 25%", Case Code (Imperial)=0603, Case Code (Metric)=1608, Case/Package=SMD/SMT, Current Rating=200mA, DC Resistance (DCR)=600mR, Inductance=1.8nH, Manufacturer="Wurth Electronics", Max Operating Temperature=125°C, Min Operating Temperature=-55°C, Test Frequency=100MHz, Tolerance=25%, Category="Ferrite Beads and Chips", ComponentLink1Description=https://datasheet.ciiva.com/14634/0900766b801ef1d0-14634816.pdf?src-supplier=Allied+Electronics, ComponentLink1URL=https://datasheet.ciiva.com/14634/0900766b801ef1d0-14634816.pdf?src-supplier=Allied+Electronics, ComponentLink2Description=https://datasheet.ciiva.com/23763/74279266-23763009.pdf?src-supplier=Newark, ComponentLink2URL=https://datasheet.ciiva.com/23763/74279266-23763009.pdf?src-supplier=Newark, ComponentLink3Description=https://datasheet.ciiva.com/11799/0900766b801ef1d0-11799352.pdf?src-supplier=RSComponents, ComponentLink3URL=https://datasheet.ciiva.com/11799/0900766b801ef1d0-11799352.pdf?src-supplier=RSComponents, ComponentLink4Description=https://datasheet.ciiva.com/14971/74279266-14971192.pdf?src-supplier=Digi-Key, ComponentLink4URL=https://datasheet.ciiva.com/14971/74279266-14971192.pdf?src-supplier=Digi-Key, ComponentLink5Description=https://datasheet.ciiva.com/12395/74279266-221135-12395453.pdf?src-supplier=Mouser, ComponentLink5URL=https://datasheet.ciiva.com/12395/74279266-221135-12395453.pdf?src-supplier=Mouser, ComponentLink6Description=https://datasheet.ciiva.com/1466/1705901-1466509.pdf?src-supplier=Element14, ComponentLink6URL=https://datasheet.ciiva.com/1466/1705901-1466509.pdf?src-supplier=Element14, ComponentLink7Description=https://datasheet.ciiva.com/22711/1705901-22711422.pdf?src-supplier=Element14, ComponentLink7URL=https://datasheet.ciiva.com/22711/1705901-22711422.pdf?src-supplier=Element14, ComponentLink8Description=https://datasheet.ciiva.com/48698/001087059-da-01-ml-we-cbf-smd-ferrit-74279266-de-en-48698427.pdf?src-supplier=Conrad, ComponentLink8URL=https://datasheet.ciiva.com/48698/001087059-da-01-ml-we-cbf-smd-ferrit-74279266-de-en-48698427.pdf?src-supplier=Conrad, Core Material=Ferrite, Depth=0.8mm, Height=0.8mm, Impedance=1kR, Lead Free="Lead Free", Length=1.6mm, Manufacturer Part Number=74279266, Max Current Rating=200mA, Max DC Current=200mA, Number of Lines=1, Packaging="Tape and Reel", Pricing 1="1=0.17000, 50=0.16800, 100=0.15500, 500=0.14800, 1000=0.14100, 2000=0.13400 (USD)", REACH SVHC=Unknown, RoHS=Yes, RoHS Compliant=Yes, Series=WE-CBF, Shielding=Unshielded, Stock 1=78275, Supplier 1=Digi-Key, Termination=SMD/SMT, Width=0.8mm
H1: library part PRPC004SAAN-RC, "CONN HEADER VERT 4POS 2.54MM", Color=Black, Manufacturer=Sullins, Standard Package=1, Supplier Part Number 1=S1011EC-04-ND, Category="Connectors, Interconnects", ComponentLink1Description=https://media.digikey.com/PDF/Data%20Sheets/Sullins%20PDFs/xRxCzzzSxxN-RC_ST_11635-B.pdf?src-supplier=Digi-Key, ComponentLink1URL=https://media.digikey.com/PDF/Data%20Sheets/Sullins%20PDFs/xRxCzzzSxxN-RC_ST_11635-B.pdf?src-supplier=Digi-Key, Connector Type="Header, Unshrouded, Breakaway", Contact Finish=Gold, Contact Finish Thickness=Flash, Contact Mating Length="0.230\" (5.84mm)", Contact Type="Male Pin", Family="Rectangular Connectors - Headers, Male Pins", Fastening Type=-, Features=-, Manufacturer Part Number=PRPC004SAAN-RC, Mounting Type="Through Hole", Number of Positions=4, Number of Positions Loaded=All, Number of Rows=1, Online Catalog="0.100\" (2.54mm) Pitch Connector Headers", Other Names="S9510E-04  S9510E-04-ND", Packaging=Bulk, Pitch="0.100\" (2.54mm)", Pricing 1="1=0.15, 10=0.146, 25=0.1084, 50=0.0928, 100=0.0898, 250=0.0774, 500=0.0743 (USD)", Row Spacing=-, Series=-, Stock 1=6306, Supplier 1=Digi-Key, Termination=Solder
J1 J3: library part B2B-PH-K-S(LF)(SN), "Connector Header, PH Series, 2 Position, 2.00mm, Through Hole, Press-Fit, Solder, Natural", Manufacturer=JST, Category=Connectors, ComponentLink1Description=http://www.farnell.com/datasheets/2057211.pdf?src-supplier=Farnell, ComponentLink1URL=http://www.farnell.com/datasheets/2057211.pdf?src-supplier=Farnell, ComponentLink2Description=http://www.farnell.com/datasheets/2057211.pdf?src-supplier=Element14, ComponentLink2URL=http://www.farnell.com/datasheets/2057211.pdf?src-supplier=Element14, ComponentLink3Description=http://www.farnell.com/datasheets/2057211.pdf?src-supplier=Newark, ComponentLink3URL=http://www.farnell.com/datasheets/2057211.pdf?src-supplier=Newark, Height=0.35inch, Length=0.2inch, Manufacturer Part Number=B2B-PH-K-S(LF)(SN), Pricing 1="1=0.17000, 10=0.16200, 25=0.12080, 50=0.10360, 250=0.08632, 750=0.07771, 1000=0.07252, 12000=0.05526, 24000=0.05008 (USD)", RoHS=Yes, Stock 1=171845, Supplier 1=Digi-Key, Weight=0.0625lb, Width=0.24inch